# Altium PCB 人体感应.PcbDoc
Units mil, origin at the board's own origin, x right, y up, seen from the top; angles counter-clockwise.
Board outline 6000 x 4000 mil, 2 copper layers (Top Layer, Bottom Layer); 3 components, 0 nets, 48 pads, 0 vias.
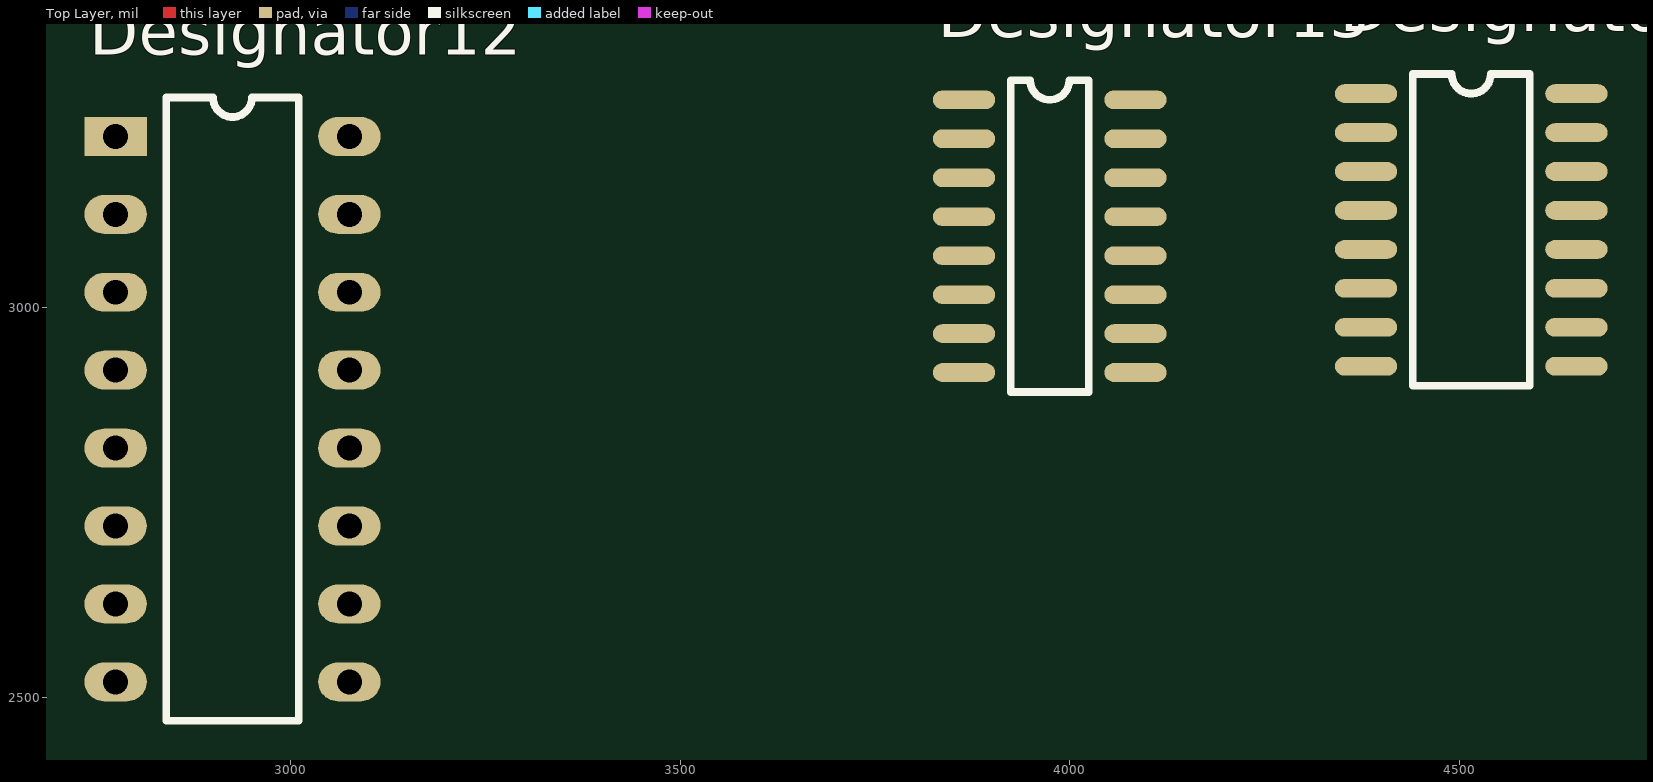
[diagram p0: Top Layer view]
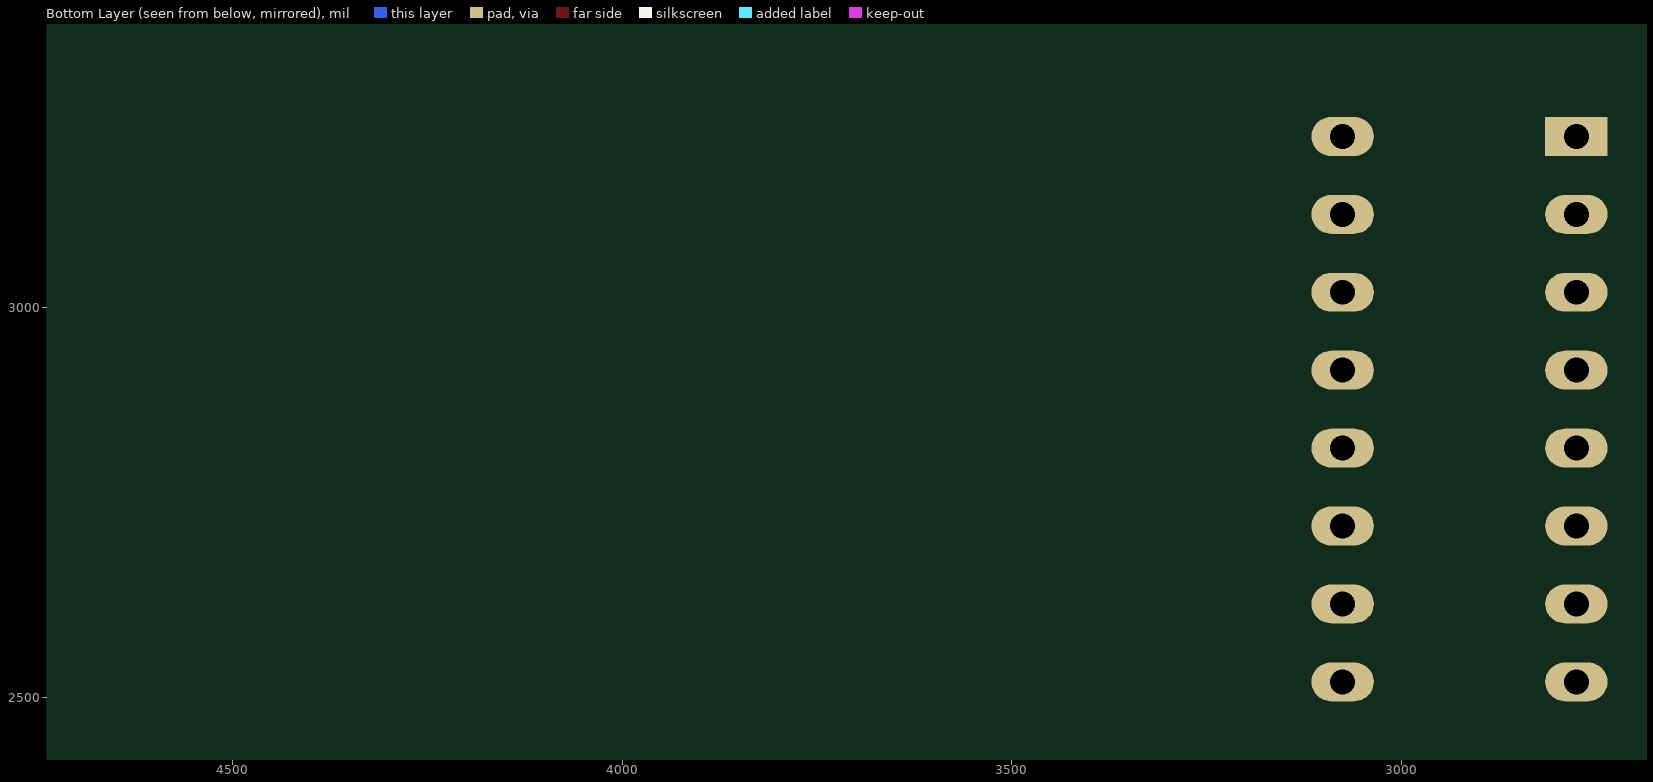
[diagram p1: Bottom Layer view, seen from below]

## Layer stack, top to bottom
Top Solder: solder mask 0.4, Solder Resist, Dk 3.5
Top Layer: signal copper 1.4
Dielectric 1: dielectric 12.6, FR-4, Dk 4.8
Bottom Layer: signal copper 1.4
Bottom Solder: solder mask 0.4, Solder Resist, Dk 3.5

## Board outline
1000,1000 7000,1000 7000,5000 1000,5000

## Design rules (kind name [scope] priority, off if disabled: settings)
Clearance [All] p1: gap=10
PolygonConnect [All] p1: connectstyle=Relief reliefconductorwidth=10 reliefentries=4 polygonreliefangle="90 Angle" airgapwidth=10
RoutingVias [All] p1: holewidth=28 width=50 viastyle="Through Hole" minholewidth=28 minwidth=50 maxholewidth=28 maxwidth=50
SolderMaskExpansion [All] p1: expansion=4
Width [All] p1: maxlimit=10 minlimit=10 preferedwidth=10
29 further rules are at their usual default settings.

## Components (designator, comment, footprint, x,y, rotation, side; value= is the part's Value field where it differs from the comment)
Designator12 "Comment" DIP16 2775,3220 r0 top
Designator13 "Comment" SO-16 3850,3095 r0 top
Designator14 "Comment" SOJ-16 4380,3275 r0 top

## Footprints (in the part's own frame and the unit in brackets; to place one, negate y for a bottom-side part, rotate by r counter-clockwise, add the part's x,y. Pads: shape width x height; smd on the part's side, far side on the other; paste and mask are expansions set on the pad)
DIP16 [mil]
  rect 80x50 hole 32: 1(0,0)
  oval 80x50 hole 32: 2(0,-100) 3(0,-200) 4(0,-300) 5(0,-400) 6(0,-500) 7(0,-600) 8(0,-700) 9(300,-700) 10(300,-600) 11(300,-500) 12(300,-400) 13(300,-300) 14(300,-200) 15(300,-100) 16(300,0)
  silkscreen extent 65,-750 235,50
SO-16 [mil]
  oval 80x24 smd: 1(14,172) 2(14,122) 3(14,72) 4(14,22) 5(14,-28) 6(14,-78) 7(14,-128) 8(14,-178) 9(234,-178) 10(234,-128) 11(234,-78) 12(234,-28) 13(234,22) 14(234,72) 15(234,122) 16(234,172)
  silkscreen extent 74,-203 174,197
SOJ-16 [mil]
  oval 80x24 smd: 1(0,0) 2(0,-50) 3(0,-100) 4(0,-150) 5(0,-200) 6(0,-250) 7(0,-300) 8(0,-350) 9(270,-350) 10(270,-300) 11(270,-250) 12(270,-200) 13(270,-150) 14(270,-100) 15(270,-50) 16(270,0)
  silkscreen extent 60,-375 210,25

## Nets (pads, with @x,y where several pads share a name; then routed paths per layer and width w, separated by ;. In a path a pad name is that pad's centre, name@x,y a point inside that pad or via, vN(x,y) a via of type N, cw(c..) or ccw(c..) an arc to the next point about the centre after c; other vN are vias at no path point)
pads on no net: Designator12.1 Designator12.2 Designator12.3 Designator12.4 Designator12.5 Designator12.6 Designator12.7 Designator12.8 Designator12.9 Designator12.10 Designator12.11 Designator12.12 Designator12.13 Designator12.14 Designator12.15 Designator12.16 Designator13.1 Designator13.2 Designator13.3 Designator13.4 Designator13.5 Designator13.6 Designator13.7 Designator13.8 Designator13.9 Designator13.10 Designator13.11 Designator13.12 Designator13.13 Designator13.14 Designator13.15 Designator13.16 Designator14.1 Designator14.2 Designator14.3 Designator14.4 Designator14.5 Designator14.6 Designator14.7 Designator14.8 Designator14.9 Designator14.10 Designator14.11 Designator14.12 Designator14.13 Designator14.14 Designator14.15 Designator14.16